# Altium PCB servo_pwr.PcbDoc (part 2 of 2)
Units mm, origin at the board's own origin, x right, y up, seen from the top; angles counter-clockwise.
Board outline 96 x 219 mm, 2 copper layers (Top Layer, Bottom Layer), stack 1.57 mm thick; 132 components, 82 nets, 367 pads, 95 vias.
Unrouted connection lines stored in the file: 2.
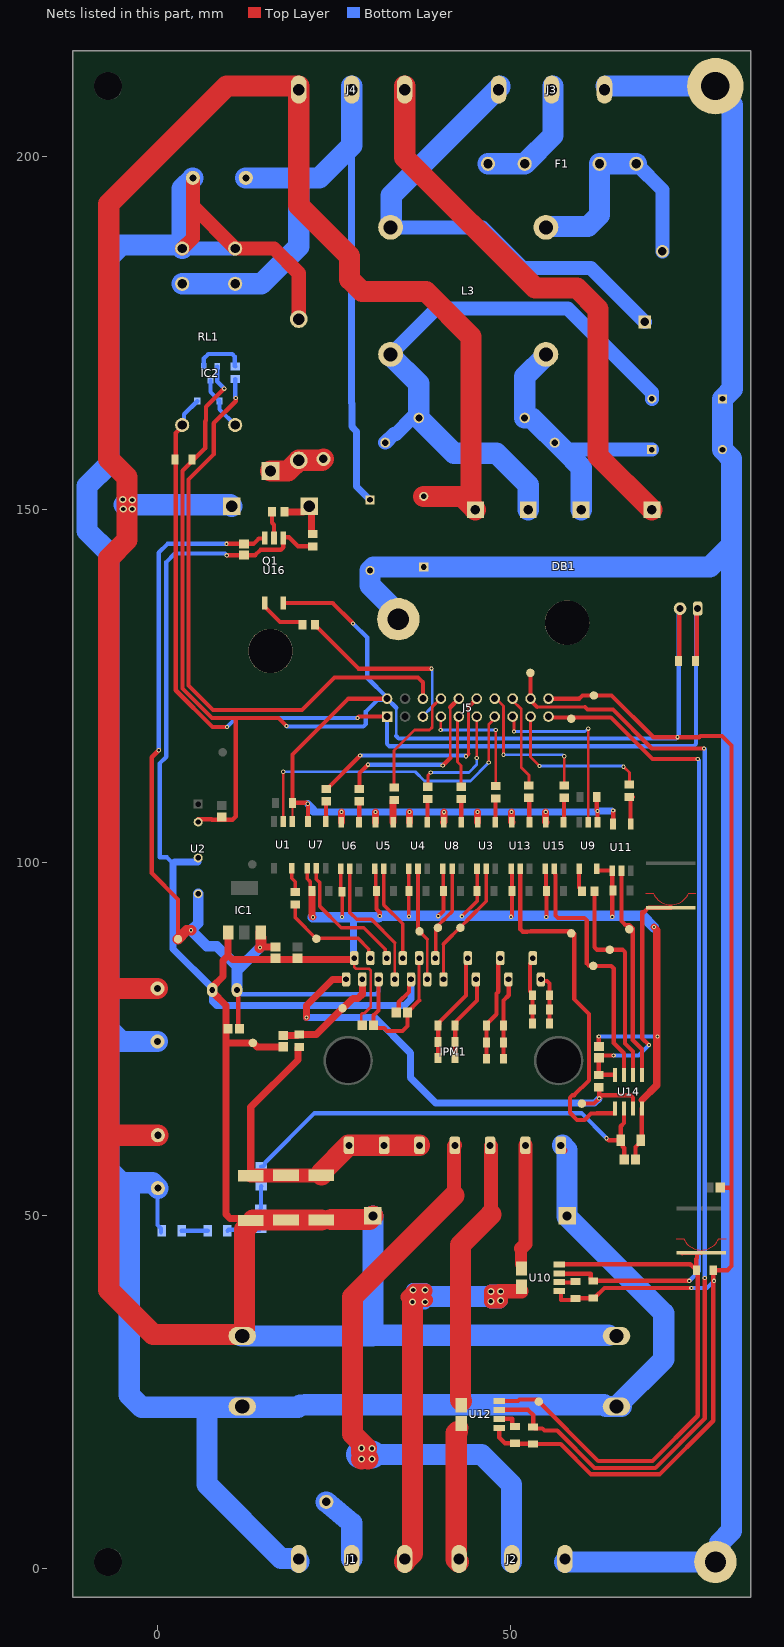
[diagram p2: the nets of this part, all layers, seen from the top]

## Via types
v1: diameter 0.6, hole 0.3, Top Layer to Bottom Layer, 78 vias
v2: diameter 1, hole 0.6, Top Layer to Bottom Layer, 17 vias

## Nets (pads, with @x,y where several pads share a name; then routed paths per layer and width w, separated by ;. In a path a pad name is that pad's centre, name@x,y a point inside that pad or via, vN(x,y) a via of type N, cw(c..) or ccw(c..) an arc to the next point about the centre after c; other vN are vias at no path point) (continued)
+15_HOT: C9.2 C10.1 C14.2 C15.2 C19.2 C37.2 IC1.3 IPM1.10 IPM1.15 TP8.1 U2.6 U16.6 | length 151.8
  Top Layer w0.4: 37.05,80.5 IPM1.10@37.05,86.5
  Top Layer w0.6: v1(0.175,115.95) -0.825,114.95 -0.825,98.544 2.9,94.819 TP8.1@2.9,89.2 ; v1(9.775,145.175) C37.2@12.225,145.175 13.575,145.175 14.35,145.95 15.15,145.95 U16.6@15.2,146 ; C10.1@11.25,82 11.422,81.828 11.422,76.678 C9.2@11.6,76.5 ; IPM1.15@31.3,83.5 31.3,79.1 30.6,78.4 C19.2@30.6,77 30.6,76.95 30.95,76.6 32.1,76.6 32.5,76.2 34.7,76.2 35.4,76.9 C15.2@35.4,78.8 35.4,78.85 37.05,80.5
  Top Layer w1: v1@14.6,88.1 C14.2@16.7,88.1
  Top Layer w1.5: TP8.1@2.9,89.2 4.15,90.45 v1(4.75,90.45) ; v1(14.5,88) 14.6,88.1 14.659,88.159 14.659,89.402 14.6,89.461 IC1.3@14.6,90.15
  Bottom Layer w0.6: v1(0.175,115.95) 0.175,143.925 1.425,145.175 v1(9.775,145.175) ; C10.1@11.25,82 11.25,81.994 11.666,81.578 11.672,81.578 11.85,81.4 30.949,81.4 31.3,81.751 IPM1.15@31.3,83.5
  Bottom Layer w1.5: U2.6@5.75,95.615 5.75,91.45 v1(4.75,90.45) 7,88.2 8.4,88.2 11.25,85.35 11.25,84.75 ; C10.1@11.25,82 11.25,84.75 ; v1(14.5,88) 11.25,84.75
+24: C46.1 C47.2 D2.2 J5.1 J6.1 RL1.2 | length 149.6
  Top Layer w0.6: RL1.2@3.5,162 3.5,161.799 2.575,160.874 2.575,124.45 7.775,119.25 v1(9.825,119.25) ; v1(28.325,120.525) 28.51,120.71 J5.1@32.51,120.71 ; C47.2@76.2,128.6 76.35,128.75 76.35,135.85 J6.1@76.5,136
  Bottom Layer w0.6: RL1.2@3.5,162 3.768,162.268 3.768,163.518 5.625,165.375 D2.2@5.625,165.4 ; v1(9.825,119.25) 11.1,120.525 v1(28.325,120.525) ; J5.1@32.51,120.71 32.51,116.851 32.861,116.5 75.899,116.5 76.25,116.851 76.25,135.75 J6.1@76.5,136
+Ug: C39.1 C40.1 C43.2 D1.K IPM1.26 J1.1 R15.2 R23.2 R24.2 R28.2 RL1.4 | length 395
  Top Layer w1: IPM1.26@57.1,60 57.1,59.5 57.35,59.25 IPM1.26@57.575,59.25 ; C43.2@58,50 C43.2@58.65,50.65
  Top Layer w2: RL1.4@3.5,187 5,188.5 5,193 ; R28.2@5,197 5,193 ; D1.K@20,177 20,183.5 16.5,187 RL1.4@11,187 5,193
  Bottom Layer w0.6: R23.2@0.05,53.925 0,53.875 0,48.725 0.5,48.225 R15.2@0.5,47.7
  Bottom Layer w2: RL1.4@3.5,187 RL1.4@11,187
  Bottom Layer w3: R24.2@0,74.7 -5.143,74.7 -6.9,76.457 ; R23.2@0.05,53.925 -0.725,54.7 -4,54.7 -5.143,54.7 ; 3.471,188.529 3.471,195.471 R28.2@5,197 ; RL1.4@3.5,187 3,187.5 -5.143,187.5 -6.9,185.743 -6.9,156.425 -9.975,153.35 -9.975,147 -6.9,143.925 -6.9,76.457 ; J1.1@20,1 20,1.1 19.6,1.5 17.5,1.5 7,12 7,22.7 7.2,22.9 ; IPM1.26@57.35,60 58,59.35 C43.2@58,50 58,49.905 71.7,36.205 71.7,29.7 C40.1@65,23 C40.1@65.7,23 ; C40.1@64.55,23 63.5,23 63.238,23.262 20.912,23.262 20.85,23.2 20.2,23.2 19.9,22.9 12,22.9 7.2,22.9 ; -6.9,76.457 -6.9,56.457 -5.143,54.7 ; -5.143,54.7 -4,53.557 -4,24.657 -2.243,22.9 7.2,22.9
AC-L: F1.1 J3.2 | length 17.9
  Bottom Layer w3: F1.1@46.8,199 F1.1@52,199 56,203 J3.2@56,210
AC-N: J3.3 L3.1 RV1.1 | length 68
  Bottom Layer w2: L3.1@33,190 46,190 51.75,184.25 61.35,184.25 RV1.1@69,176.6
  Bottom Layer w3: L3.1@33,190 33.096,190.096 33.096,194.496 48.5,209.9 J3.3@48.5,210
ADC_CLK: J5.14 R21.1 | length 21.4
  Top Layer w0.4: J5.14@47.75,123.25 47.959,123.25 49,122.209 v1(49,115.3) ; R21.1@57.6,110.975 v1(57.6,115.1)
  Bottom Layer w0.4: v1(49,115.3) 57.346,115.3 57.546,115.1 v1(57.6,115.1)
ADC_CS: J5.13 R20.1 | length 13.2
  Top Layer w0.4: J5.13@50.29,123.25 50.29,123.01 51.5,121.8 51.5,113.5 52.6,112.4 R20.1@52.6,110.975
ADC_MISO: J5.8 U9.5 | length 26.1
  Top Layer w0.4: J5.8@50.29,120.71 50.462,120.538 50.462,118.638 v1(50.5,118.6) ; U9.5@61,105.75 v1(61,119)
  Bottom Layer w0.4: v1(50.5,118.6) 60.546,118.6 60.946,119 v1(61,119)
ADC_MOSI: J5.9 R13.1 | length 22.3
  Top Layer w0.4: J5.9@52.83,120.71 52.83,114.97 v1(54.1,113.7) ; v1(66,113.6) 66.825,112.775 R13.1@66.825,111.1
  Bottom Layer w0.4: v1(54.1,113.7) 65.846,113.7 65.946,113.6 v1(66,113.6)
B-: D1.A pad.1@23.5,157.2 Q1.2 | length 8.2
  Top Layer w3: Q1.2@16,155.5 18.5,155.5 D1.A@20,157 23.3,157 pad.1@23.5,157.2
BRAKE: J5.3 R22.1 | length 26.5
  Top Layer w0.6: R22.1@22.275,133.7 22.275,133.6 22.55,133.325 22.65,133.325 28.475,127.5 v1(38.8,127.5)
  Bottom Layer w0.4: J5.3@37.59,120.71 37.59,120.79 38.9,122.1 38.9,127.346 38.8,127.446 v1(38.8,127.5)
EARTH: C41.2 C42.1 C44.2 C45.1 DB1. J2.3 J3.1 MH3.1 MH4.1 MH7.1 Q1. | length 310.2
  Bottom Layer w3: MH4.1@34.1,134.5 34.1,135.312 30.1,139.312 C44.2@30.1,141.4 30.6,141.9 78.2,141.9 81.3,145 ; J2.3@57.627,1 MH3.1@79,1 79.574,1.574 79.574,3.695 81.3,5.421 81.3,145 ; J3.1@63.5,210 MH7.1@79,210 79,209.729 81.4,207.329 81.4,167.098 C42.1@80,165.698 C41.2@80,158.52 81.3,157.22 81.3,145
GND: C1.1 C2.1 C23.1 C26.1 C27.1 C28.1 C29.1 C32.1 C33.1 C46.2 C47.1 IC2.2 J5.11 J5.20 J6.2 TP13.1 U1.4 U2.2 U3.3 U4.3 U5.3 U6.3 U7.3 U8.3 U9.4 U10.5 U11.3 U12.5 U13.3 U15.3 U16.3 | length 478
  Top Layer w0.3: U1.4@19.1,105.85 C1.1@19.1,108.5
  Top Layer w0.6: U2.2@5.75,106.185 7.645,106.185 7.73,106.1 10.625,106.1 11.075,106.55 11.075,120.5 ; v1(9.45,167.15) 6.88,164.58 6.88,162.659 6.75,162.528 6.75,158.725 3.55,155.525 3.55,124.675 7.725,120.5 11.075,120.5 ; U16.3@17.8,136.8 24.8,136.8 27.5,134.1 v1(27.7,133.9) ; v1(18.25,119.375) 17.125,120.5 11.075,120.5 ; U7.3@21.3,105.85 21.3,108.35 v1(21.275,108.375) 21.15,108.5 C1.1@19.1,108.5 19.1,115.325 27.025,123.25 J5.20@32.51,123.25 ; U12.5@48.4,19.995 48.4,18.6 49.2,17.8 C33.1@50.6,17.8 50.65,17.75 53.15,17.75 C32.1@53.2,17.7 57.1,17.7 61.4,13.4 71.1,13.4 78.7,21 C27.1@78.7,42.3 80.7,42.3 81.3,42.9 81.3,53.649 ; J5.11@55.37,123.25 59.732,123.25 60.182,123.7 TP13.1@61.8,123.7 64.3,123.7 70.199,117.801 v1(73.624,117.801) 76.711,117.801 76.862,117.951 79.949,117.951 81.3,116.6 81.3,53.649 ; U10.5@56.9,39.338 57.026,39.338 57.151,39.213 57.151,38.1 C29.1@59.2,38.1 ; C29.1@59.2,38.3 59.25,38.35 61.65,38.35 C28.1@61.7,38.4 61.9,38.4 63.3,39.8 v1(75.6,39.8) ; C23.1@62.2,109.3 62.2,107.45 v1(62.325,107.325) 62.3,107.3 U9.4@62.3,105.75 ; U11.3@64.5,105.5 64.525,105.525 v1(64.525,107.425) ; C47.1@73.8,128.6 73.9,128.7 73.9,135.9 J6.2@74,136 ; C26.1@79.7,54 80.949,54 81.3,53.649
  Top Layer w1: U6.3@26.035,105.75 26.05,105.765 v1(26.05,107.225) ; U5.3@30.863,105.75 30.875,105.762 v1(30.875,107.2) ; v1(35.675,107.2) 35.675,105.765 U4.3@35.69,105.75 ; U8.3@40.517,105.75 40.575,105.808 v1(40.575,107.175) ; v1(45.325,107.2) 45.325,105.769 U3.3@45.344,105.75 ; v1(50.125,107.225) 50.125,105.797 U13.3@50.172,105.75 ; v1(54.975,107.225) 54.975,105.775 U15.3@55,105.75
  Bottom Layer w0.4: 33.8,117.976 33.8,121.96
  Bottom Layer w0.6: IC2.2@8.45,170.3 8.45,168.15 v1(9.45,167.15) ; v1(18.25,119.375) 18.3,119.325 29.149,119.325 29.5,119.676 29.5,121.45 31.128,123.078 32.338,123.078 J5.20@32.51,123.25 ; v1(27.7,133.9) 29.7,131.9 29.7,126.203 32.51,123.393 J5.20@32.51,123.25 ; 33.8,117.976 34.151,117.625 73.449,117.625 73.8,117.976 73.8,135.8 J6.2@74,136 ; 33.8,121.96 J5.20@32.51,123.25 ; v1@64.35,107.35 64.425,107.425 v1(64.525,107.425) ; v1(75.6,39.8) 77.8,39.8 v1(78.8,40.8)
  Bottom Layer w1: v1(21.275,108.375) 22.05,107.6 22.05,107.175 v1(40.575,107.175) 62.175,107.175 v1(62.325,107.325) ; v1@62.325,107.35 v1@64.35,107.35
GNDH: C3.1 C4.1 C5.1 C6.1 C7.1 C8.1 C9.1 C10.2 C14.1 C15.1 C19.1 C24.1 C25.1 C30.1 C31.1 C34.1 C35.1 C36.1 C37.1 C39.2 C40.2 C43.1 C45.2 DB1.4 IC1.1 IPM1.11 IPM1.18 J4.3 Q1.3 R11.1 R12.1 R14.1 R19.1 R23.1 R24.1 R26.1 TP10.1 U2.4 U3.4 U4.4 U5.4 U6.4 U7.4 U8.4 U9.3 U11.4 U13.4 U14.4 U15.4 U16.4 | length 803.9
  Top Layer w0.4: IPM1.18@27.85,86.5 27.85,86.4 27.85,85.234 28.084,85 29.966,85 30.2,84.766 30.2,79.6 29.3,78.7 29.034,78.7 28.846,78.512 28.846,77.154 C19.1@29,77
  Top Layer w0.5: U7.4@21.2,99.25 21.2,97.75 21.6,97.35 21.6,96.25 C8.1@21.85,96 ; U6.4@25.935,99.15 25.935,96.515 26.25,96.2 C7.1@26.25,96 ; C7.1@26.1,95.9 26.142,95.858 v1(26.142,92.317) ; U5.4@30.763,99.15 30.881,99.031 30.881,96.119 C6.1@31,96 ; U4.4@35.59,99.15 35.595,99.145 35.595,96.005 C5.1@35.6,96 v1(35.6,92.4) ; U8.4@40.417,99.15 40.459,99.109 40.459,96.041 C4.1@40.5,96 ; v1(43.1,92.425) 45.25,94.575 C3.1@45.25,96 45.247,96.003 45.247,99.147 U3.4@45.244,99.15
  Top Layer w0.6: v1(9.8,143.55) 12.2,143.55 C37.1@12.225,143.575 13.825,143.575 14.575,144.325 17.449,144.325 17.8,144.676 U16.4@17.8,146 17.9,146.1 18.625,146.1 19.9,144.825 R26.1@22,144.825 ; C6.1@31,96 31,93.425 31.475,92.95 v1(31.475,92.475) ; C15.1@33.8,78.8 34.15,79.15 34.15,80.25 35.6,81.7 35.6,83.2 IPM1.11@35.9,83.5 ; v1(39.75,92.45) 40.5,93.2 C4.1@40.5,96 ; U13.4@50.072,99.15 50.072,98.8 50.2,98.672 C34.1@50.2,96 50.2,92.475 v1(50.075,92.35) ; U15.4@54.9,99.15 55,99.05 55,96.1 C36.1@55.1,96 55.1,92.375 v1(55.05,92.325) ; U9.3@62.2,99.15 62.2,99 62.3,98.9 U11.4@64.4,98.9 v1(64.4,92.35) ; C35.1@62.5,74 v1(62.5,75.4) ; C31.1@67.7,58 67.7,59.775 68.4,60.475 R19.1@68.4,60.7 68.584,60.884 68.584,65.217 U14.4@68.605,65.238 68.605,66.405
  Top Layer w1: IC1.1@10,90.15 10,86.9 ; R14.1@13.2,49.35 12.9,49.65 10.286,49.65 9.7,50.236 9.7,74.6 ; C24.1@17.8,73.95 14.104,73.95 13.554,74.5 TP10.1@13.5,74.5 9.8,74.5 9.7,74.6 ; C8.1@21.85,96 21.85,92.45 v1(22,92.3) ; IPM1.18@27.85,86.4 27.75,86.3 19.8,86.3 16.7,86.3 10.6,86.3 10,86.9 ; 68.605,66.405 70.7,68.5 70.7,90.5 v1(70.3,90.9) ; 9.7,74.6 9.7,76.5 9.7,79.8 7.75,81.75 C10.2@7.75,82 7.75,82.385 9.26,83.895 9.26,86.16 10,86.9
  Top Layer w3: R24.1@0,82.2 -6.5,82.2 -6.9,82.6 ; R23.1@0.05,61.425 -6.625,61.425 -6.9,61.7 ; R14.1@12.875,48.65 12.3,48.075 12.3,33.2 -0.6,33.2 -6.9,39.5 -6.9,61.7 ; R14.1@13.525,49.425 R12.1@17.875,49.425 ; R12.1@18.2,49.425 R11.1@23.2,49.425 ; R11.1@24.6,49.5 30,49.5 C43.1@30.5,50 ; C45.2@37.7,151.9 43.1,151.9 DB1.4@44.4,150.6 ; DB1.4@45,150 DB1.4@44.4,150.6 ; -6.9,61.7 -6.9,82.6 ; -6.9,82.6 -6.9,143.1 -4.3,145.7 -4.3,151.4 -4.3,154.6 -6.9,157.2 -6.9,193.3 9.8,210 20,210 20,193.1 27.2,185.9 27.2,182.657 28.957,180.9 38,180.9 44.4,174.5 44.4,151.9 DB1.4@44.4,150.6
  Bottom Layer w0.6: 2.2,99.914 1.339,100.775 0.3,100.775 0.3,114.075 1.25,115.025 1.25,142.6 2.45,143.8 9.55,143.8 v1(9.8,143.55) ; v1(62.5,75.4) v1(70.8,75.4)
  Bottom Layer w1: U2.4@5.75,100.14 2.426,100.14 2.2,99.914 2.2,87.8 7.75,82.25 C10.2@7.75,82 7.8,81.95 7.8,80.386 8.386,79.8 35,79.8 35.9,80.7 IPM1.11@35.9,83.5 ; 27.75,92.399 27.75,86.6 IPM1.18@27.85,86.5
  Bottom Layer w1.5: v1(22,92.3) 26.125,92.3 v1(26.142,92.317) 27.484,92.317 ; 27.75,92.3 31.3,92.3 v1(31.475,92.475) ; v1@31.475,92.486 35.6,92.486 39.75,92.486 43.1,92.486 50.075,92.486 55.05,92.486 64.4,92.486 68.714,92.486 v1(70.3,90.9)
  Bottom Layer w2: C43.1@29.925,49.425 C43.1@30.5,50
  Bottom Layer w3: -4.7,150.7 -3.4,150.7 10.3,150.7 Q1.3@10.5,150.5 ; C39.2@11.9,33 C39.2@12,33 30.4,33 30.5,33.1 ; C43.1@30.5,50 30.5,33.1 ; C40.2@63.85,33.1 30.5,33.1
  other v2: -4.85,150.1 -3.575,150.125 -3.575,151.4 -4.925,151.45
HinU: J5.4 R6.1 | length 17.6
  Top Layer w0.4: v1(40.1,118.8) J5.4@40.1,120.68 ; R6.1@47.9,110.875 v1(47.9,118.8)
  Top Layer w0.6: J5.4@40.1,120.68 J5.4@40.13,120.71
  Bottom Layer w0.4: v1(40.1,118.8) v1(47.9,118.8)
HinV: J5.5 R3.1 | length 10.2
  Top Layer w0.4: J5.5@42.67,120.71 42.5,120.54 42.5,114.3 43,113.8 R3.1@43,110.775
HinW: J5.6 R4.1 | length 16
  Top Layer w0.4: R4.1@38.3,110.775 38.3,112.4 v1(38.7,112.8) ; v1(45.21,114.844) J5.6@45.21,120.71
  Bottom Layer w0.4: v1(38.7,112.8) 44.1,112.8 45.21,113.91 v1(45.21,114.844)
I_U: C28.2 J5.10 TP14.1 U10.7 | length 117.5
  Top Layer w0.6: J5.10@55.37,120.71 55.48,120.6 64.2,120.6 70.1,114.7 v1(76.5,114.7) ; U10.7@56.9,41.878 56.978,41.8 61.349,41.8 61.349,41 61.549,40.8 C28.2@61.7,40.8 v1(75.3,40.8)
  Bottom Layer w0.6: v1(75.3,40.8) 76.7,42.2 76.7,114.5 v1(76.5,114.7)
I_V: C32.2 J5.12 TP16.1 U12.7 | length 162.6
  Top Layer w0.4: 53.763,122.073 60.527,122.073
  Top Layer w0.6: U12.7@48.4,22.535 52.465,22.535 53.2,21.8 C32.2@53.2,20.1 53.4,19.9 54.5,19.9 54.8,19.6 56.6,19.6 61.9,14.3 70.5,14.3 77.5,21.3 v1(77.5,41.2) ; TP16.1@52.8,126.9 52.815,126.885 52.815,123.021 53.763,122.073 ; 60.527,122.073 60.9,121.7 64.5,121.7 70,116.2 v1(77.4,116.2)
  Bottom Layer w0.6: v1(77.4,116.2) 77.5,116.1 v1(77.5,41.2)
IGBT_flt: J5.7 U1.5 | length 44.6
  Top Layer w0.4: U1.5@17.8,105.85 v1(17.8,112.9) ; v1(46.9,114.2) 46.9,119.574 47.75,120.424 J5.7@47.75,120.71
  Bottom Layer w0.4: v1(17.8,112.9) 36.5,112.9 37.8,111.6 44.3,111.6 v1(46.9,114.2)
IGBT_Temp: IPM1.19 R8.1 TP17.1 U14.3 | length 68.6
  Top Layer w0.6: TP17.1@60.1,65.9 61.8,65.9 v1(62.55,66.65) ; R8.1@62.5,68.225 62.55,68.175 v1(62.55,66.65) ; U14.3@67.335,65.238 67.335,66.749 66.984,67.1 63,67.1 v1(62.55,66.65)
  Top Layer w1: v1(21.1,78.1) 21.1,79.8 24.8,83.5 IPM1.19@26.7,83.5
  Bottom Layer w1: v1(21.1,78.1) 30.8,78.1 35.8,73.1 35.8,69.6 39.4,66 61.9,66 v1(62.55,66.65)
LinU: J5.17 R5.1 | length 16.6
  Top Layer w0.4: R5.1@33.5,110.675 33.5,115.9 36.4,118.8 38.5,118.8 38.9,119.2 38.9,122.1 40.05,123.25 J5.17@40.13,123.25
LinV: J5.16 R1.1 | length 25
  Top Layer w0.4: 41.449,114.849 41.449,122.029
  Top Layer w0.6: R1.1@28.6,110.475 28.6,112.7 v1(29.8,113.9) ; v1(40.4,113.8) 41.449,114.849 ; 41.449,122.029 J5.16@42.67,123.25
  Bottom Layer w0.6: v1(29.8,113.9) 40.3,113.9 v1(40.4,113.8)
LinW: J5.15 R2.1 | length 30.6
  Top Layer w0.4: 44.033,115.433 44.033,122.073
  Top Layer w0.6: R2.1@23.9,110.475 24,110.475 v1@28.713,115.187 ; v1(43.7,115.1) 44.033,115.433 ; 44.033,122.073 J5.15@45.21,123.25
  Bottom Layer w0.6: v1(28.7,115.2) 43.6,115.2 v1(43.7,115.1)
NetC11_1: C11.1 C16.1 C22.1 IPM1.2 | length 9.6
  Top Layer w0.6: C11.1@53.1,77.25 C16.1@53.1,79.25 53.1,81.45 52.75,81.8 52.75,85.7 53.15,86.1 IPM1.2@53.15,86.5
NetC11_2: C11.2 C16.2 C22.2 IPM1.1 | length 7.1
  Top Layer w0.6: IPM1.1@54.3,83.5 54.55,83.25 55.149,83.25 55.5,82.899 C22.2@55.5,81.25 C16.2@55.5,79.25 C11.2@55.5,77.25
NetC12_1: C12.1 C17.1 C20.1 IPM1.4 | length 15.1
  Top Layer w0.6: C12.1@46.6,72.25 C20.1@46.6,74.55 C17.1@46.6,76.95 46.6,77.15 48,78.55 48,81.5 48.25,81.75 48.25,86.2 IPM1.4@48.55,86.5
NetC12_2: C12.2 C17.2 C20.2 IPM1.3 | length 11.6
  Top Layer w0.6: C12.2@49,72.25 C20.2@49,74.55 C17.2@49,76.95 49,80.5 49.75,81.25 49.75,83.45 IPM1.3@49.7,83.5
NetC13_1: C13.1 C18.1 C21.1 IPM1.6 | length 15.9
  Top Layer w0.6: C13.1@39.75,72.35 C18.1@39.75,74.65 C21.1@39.75,76.95 39.95,77.15 39.95,77.45 43.7,81.2 43.7,86.25 IPM1.6@43.95,86.5
NetC13_2: C13.2 C18.2 C21.2 IPM1.5 | length 12.5
  Top Layer w0.6: C13.2@42.15,72.35 C18.2@42.15,74.65 C21.2@42.15,76.95 42.35,77.15 42.35,77.6 45.25,80.5 45.25,83.35 IPM1.5@45.1,83.5
NetC24_2: C24.2 IPM1.17 R9.1 TP9.1 | length 15.7
  Top Layer w1: C24.2@17.8,75.55 19.825,75.55 19.95,75.675 R9.1@20.05,75.675 22.475,75.675 TP9.1@26.2,79.4 26.254,79.4 27.654,80.8 28.414,80.8 29,81.386 IPM1.17@29,83.5
NetC27_2: C27.2 pad.2@77,44.75 TP15.1 U10.8 U12.8 | length 88.4
  Top Layer w0.15: 73.45,46.8 74.5,46.8 ccw(c77,47.9) 77,45.169 ccw(c77,47.9) 79.5,46.8 80.55,46.8
  Top Layer w0.6: U12.8@48.4,23.805 51.064,23.805 51.259,24 53.7,24 62.4,15.3 70.1,15.3 76.5,21.7 76.5,42.1 C27.2@76.3,42.3 C27.2@76.3,42.5 ; U10.8@56.9,43.148 75.452,43.148 75.9,42.7 76.1,42.7 C27.2@76.3,42.5 ; pad.2@74.3,44.7 74.35,44.75 pad.2@76.449,44.75 ; pad.2@77,44.75 pad.2@76.449,44.75 ; C27.2@76.3,42.5 76.3,43.9 76.399,43.999 76.399,44.7 pad.2@76.449,44.75
NetC29_2: C29.2 U10.6 | length 2.3
  Top Layer w0.6: U10.6@56.9,40.608 56.954,40.554 59.146,40.554 C29.2@59.2,40.5
NetC31_2: C31.2 R18.1 R19.2 U14.2 | length 63.4
  Top Layer w0.6: v1(63.6,61) 63.9,60.7 R19.2@65.6,60.7 ; U14.2@66.065,65.238 66.065,63.165 65.6,62.7 R19.2@65.6,60.7 ; C31.2@66.1,58 66.1,59.6 65.9,59.8 65.9,60.4 R19.2@65.6,60.7
  Bottom Layer w0.6: R18.1@14.7,57 14.925,57 15.225,57.3 15.225,57.525 22.249,64.549 60.051,64.549 v1(63.6,61)
NetC33_2: C33.2 U12.6 | length 3.1
  Top Layer w0.6: U12.6@48.4,21.265 50.249,21.265 50.249,20.4 50.449,20.2 C33.2@50.6,20.2
NetC35_2: C35.2 pad.1@72.7,93.65 R8.2 U14.8 | length 44.5
  Top Layer w0.15: 69.15,95.7 70.2,95.7 ccw(c72.7,96.8) 72.7,94.069 ccw(c72.7,96.8) 75.2,95.7 76.25,95.7
  Top Layer w0.6: v1(64.6,72.7) 62.8,72.7 C35.2@62.5,72.4 R8.2@62.5,69.975 64.774,69.975 64.774,70 64.795,69.979 U14.8@64.795,69.962 ; v1(69.6,74.2) 68.651,75.149 68.651,93 68.9,93 69.55,93.65 pad.1@72.7,93.65
  Bottom Layer w0.6: v1(64.6,72.7) 68.1,72.7 v1(69.6,74.2)
NetC38_1: C38.1 C41.1 DB1.2 L3.4 R27.2 | length 40.1
  Bottom Layer w2: C38.1@52,163 C38.1@52.3,162.7 ; 57.48,158.52 C41.1@70,158.52
  Bottom Layer w3: L3.4@55,172 55,171.865 52,168.865 C38.1@52,163 53,163 57.48,158.52 60,156 DB1.2@60,150
NetC38_2: C38.2 C42.2 DB1.3 L3.2 R27.1 | length 85.3
  Bottom Layer w2: R27.1@32.25,159.5 33.5,160.75 33.75,160.75 36,163 C38.2@37,163 ; L3.2@33,172 39.5,178.5 58.1,178.5 70,166.6 C42.2@70,165.698
  Bottom Layer w3: L3.2@33,172 33,171.865 37,167.865 C38.2@37,163 42,158 48,158 52.5,153.5 DB1.3@52.5,150
NetD2_1: D2.1 IC2.3 RL1.1 | length 7.7
  Bottom Layer w0.6: IC2.3@7.5,168.3 7.5,166.7 8.775,165.425 D2.1@8.775,165.4 8.775,164.225 RL1.1@11,162
NetF1_2: F1.2 L3.3 RV1.2 | length 34.7
  Bottom Layer w2: F1.2@67.8,199 71.5,195.3 RV1.2@71.5,186.6
  Bottom Layer w3: L3.3@55,190 55.096,190.096 60.938,190.096 62.6,191.757 F1.2@62.6,199 F1.2@67.8,199
NetIC2_1: IC2.1 R29.2 | length 7.4
  Bottom Layer w0.6: IC2.1@6.55,170.3 6.55,171.425 7.2,172.075 10.574,172.075 10.925,171.724 10.925,170.35 R29.2@11,170.275
NetIPM1_7: IPM1.7 TP3.1 U3.5 | length 18.2
  Top Layer w0.4: IPM1.7@40.5,83.5 40.5,88.5
  Top Layer w0.5: 40.5,88.5 43.15,91.15 43.161,91.15 43.6,91.589 43.6,91.6 43.611,91.6 44.05,92.039 44.05,92.05 46.544,94.544 U3.5@46.544,99.15
NetIPM1_8: IPM1.8 TP4.1 U8.5 | length 13.6
  Top Layer w0.5: IPM1.8@39.35,86.5 39.4,86.55 39.4,90.8 40.05,91.45 40.05,91.461 40.489,91.9 40.5,91.9 40.5,91.911 40.939,92.35 40.95,92.35 41.717,93.117 U8.5@41.717,99.15
NetIPM1_9: IPM1.9 TP5.1 U4.5 | length 16.2
  Top Layer w0.4: IPM1.9@38.2,83.5 38.2,89.2
  Top Layer w0.5: U4.5@36.89,99.15 36.89,90.51 38.2,89.2
NetIPM1_12: IPM1.12 U5.5 | length 13.8
  Top Layer w0.5: U5.5@32.063,99.15 32.063,94.037 34.75,91.35 IPM1.12@34.75,86.5
NetIPM1_13: IPM1.13 U6.5 | length 19.5
  Top Layer w0.4: IPM1.13@33.6,83.5 33.6,88.7
  Top Layer w0.5: U6.5@27.235,99.15 27.235,92.965 28.2,92 30.3,92 33.6,88.7
NetIPM1_14: IPM1.14 U7.5 | length 18.7
  Top Layer w0.5: U7.5@22.5,99.25 22.5,97.7 23,97.2 23,93.825 26.025,90.8 29.2,90.8 32.233,87.767 32.233,86.717 IPM1.14@32.45,86.5
NetIPM1_16: IPM1.16 R7.2 TP2.1 | length 15.6
  Top Layer w0.5: R7.2@19.5,94.125 19.5,92.25 TP2.1@22.5,89.25 22.55,89.3 28.4,89.3 29.933,87.767 29.933,86.717 IPM1.16@30.15,86.5
NetIPM1_20: IPM1.20 IPM1.21 IPM1.22 R9.2 R11.2 R12.2 R14.2 | length 46.9
  Top Layer w1: R14.2@13.2,55.7 13.2,65.4 19.9,72.1 19.9,73.85 19.975,73.925 R9.2@20.05,73.925
  Top Layer w2: R14.2@13.237,55.737 18.2,55.737 R11.2@23.162,55.737
  Top Layer w3: R11.2@23.2,55.775 23.2,56.15 27.05,60 IPM1.20@27.1,60 IPM1.21@32.1,60 IPM1.22@37.1,60
NetIPM1_24: IPM1.24 U12.1 U12.2 | length 37.9
  Top Layer w2: 47.2,50.2 IPM1.24@47.2,59.9
  Top Layer w3: U12.1@43.033,23.805 42.9,23.938 42.9,45.9 47.2,50.2
NetIPM1_25: IPM1.25 U10.1 U10.2 | length 17.1
  Top Layer w1.7: U10.1@51.5,43.181 51.5,45.4
  Top Layer w2: 51.5,45.4 52.1,46 IPM1.25@52.1,60
NetJ1_2: J1.2 pad.1@23.9,9.5 | length 9.8
  Bottom Layer w3: pad.1@23.9,9.5 27.5,6.5 J1.2@27.5,1.4
NetQ1_1: Q1.1 R25.2 R26.2 | length 8
  Top Layer w1: R25.2@17.975,149.7 20.7,149.7 Q1.1@21.5,150.5 21.825,150.175 21.825,146.65 21.9,146.575 R26.2@22,146.575
NetR1_2: R1.2 U6.1 | length 3
  Top Layer w0.6: U6.1@28.535,105.75 28.568,105.782 28.568,108.693 R1.2@28.6,108.725
NetR2_2: R2.2 U7.1 | length 2.9
  Top Layer w0.6: U7.1@23.8,105.85 23.85,105.9 23.85,108.675 R2.2@23.9,108.725
NetR3_2: R3.2 U8.1 | length 3.3
  Top Layer w0.6: R3.2@43,109.025 43.009,109.016 43.009,105.759 U8.1@43.017,105.75
NetR4_2: R4.2 U4.1 | length 3.3
  Top Layer w0.6: U4.1@38.19,105.75 38.245,105.805 38.245,108.97 R4.2@38.3,109.025
NetR5_2: R5.2 U5.1 | length 3.3
  Top Layer w1: U5.1@33.363,105.75 33.363,108.85 33.438,108.925 R5.2@33.5,108.925
NetR6_2: R6.2 U3.1 | length 3.4
  Top Layer w0.6: U3.1@47.844,105.75 47.872,105.778 47.872,109.097 R6.2@47.9,109.125
NetR7_1: R7.1 U1.3 | length 3.6
  Top Layer w0.5: U1.3@19,99.25 19,97.8 19.5,97.3 R7.1@19.5,95.875
NetR10_1: R10.1 U9.1 | length 3.3
  Top Layer w0.6: U9.1@59.7,99.15 59.7,96.525 60.125,96.1 R10.1@60.125,96
NetR10_2: R10.2 TP12.1 U14.6 | length 30.4
  Top Layer w0.6: R10.2@61.875,96 61.875,88.051 62.226,87.7 65.849,87.7 66.2,87.349 66.2,74.4 67.335,73.265 U14.6@67.335,69.962
NetR13_2: R13.2 U11.1 | length 4
  Top Layer w0.6: U11.1@67,105.5 67,109.05 67.275,109.325 R13.2@67.3,109.325
NetR15_1: R15.1 R16.2 | length 3.7
  Bottom Layer w0.6: R15.1@3.4,47.9 R16.2@7.1,47.9
NetR16_1: R16.1 R17.2 | length 4.8
  Bottom Layer w0.6: R16.1@9.9,47.9 10.05,48.05 14.45,48.05 R17.2@14.6,48.2
NetR17_1: R17.1 R18.2 | length 3.2
  Bottom Layer w0.6: R17.1@14.6,51 14.65,51.05 14.65,54.15 R18.2@14.7,54.2
NetR20_2: R20.2 U13.1 | length 3.5
  Top Layer w0.6: R20.2@52.6,109.225 52.636,109.189 52.636,105.786 U13.1@52.672,105.75
NetR21_2: R21.2 U15.1 | length 3.5
  Top Layer w0.6: U15.1@57.5,105.75 57.55,105.8 57.55,109.175 R21.2@57.6,109.225
NetR22_2: R22.2 U16.1 | length 7
  Top Layer w0.6: U16.1@15.2,136.8 15.2,136.25 17.35,134.1 20.125,134.1 20.15,134.075 20.25,134.075 20.525,133.8 R22.2@20.525,133.7
NetR25_1: R25.1 U16.5 | length 3.8
  Top Layer w0.6: R25.1@16.225,149.7 16.2,149.675 16.2,148.175 16.5,147.875 U16.5@16.5,146
NetTP18_1: TP18.1 U13.5 U14.1 | length 51.8
  Top Layer w0.6: U13.5@51.372,99.15 51.372,90.606 51.723,90.254 52.32,90.254 cw(c52.85,87.2) 52.85,90.3 53.45,90.3 58.649,90.3 59,89.949 59,80.7 61.1,78.6 61.1,69.2 59,67.1 58.751,67.1 58.4,66.749 58.4,64.6 59.4,63.6 60.5,63.6 61.4,64.5 62.2,64.5 62.253,64.553 64.774,64.553 64.795,64.574 U14.1@64.795,65.238
NetTP19_1: TP19.1 U11.5 U14.5 | length 30.5
  Top Layer w0.6: U11.5@65.7,98.9 65.7,91.751 66.251,91.2 66.8,91.2 67.3,90.7 67.3,74.9 68.605,73.595 U14.5@68.605,69.962
NetTP20_1: TP20.1 U14.7 U15.5 | length 37.3
  Top Layer w0.6: U15.5@56.2,99.15 56.3,99.05 56.3,98.424 56.375,98.349 56.375,92.551 56.726,92.2 60.449,92.2 60.8,91.849 60.8,85.751 61.151,85.4 TP20.1@61.7,85.4 64.249,85.4 64.6,85.049 64.6,74.5 66.065,73.035 U14.7@66.065,69.962
P0: DB1.1 J4.1 | length 78
  Top Layer w3: J4.1@35,210 35,199.9 53.5,181.4 59.4,181.4 62.4,178.4 62.4,157.6 DB1.1@70,150
P1: C44.1 J4.2 R28.1 RL1.3 | length 105
  Bottom Layer w1: 27.5,201.6 27.5,165.1 27.538,165.063 27.538,161.763 28.2,161.1 28.2,153.3 C44.1@30.1,151.4
  Bottom Layer w3: RL1.3@3.5,182 RL1.3@11,182 14.7,182 20,187.3 20,196.9 19.9,197 ; R28.1@12.5,197 19.9,197 ; J4.2@27.5,210 27.5,201.6 22.9,197 19.9,197
Softstart: J5.18 R29.1 | length 85.3
  Top Layer w0.6: v1(11.075,165.825) 11.075,165.375 7.95,162.25 7.95,157.85 4.4,154.3 4.4,125.125 7.875,121.65 20.45,121.65 25.05,126.25 36.9,126.25 37.59,125.56 J5.18@37.59,123.25
  Bottom Layer w0.6: R29.1@11,168.525 11,165.9 v1(11.075,165.825)
U_phase: J1.3 U10.3 U10.4 | length 67.4
  Top Layer w2: 35.4,38.5 36.3,39.4 v2@37.933,39.4 ; v2@36.1,38.1 v2@38,38.1 ; v2(47.2,39.3) v2(47.2,37.9) 48.5,37.9 v2(48.6,38) ; v2@47.533,39.3 v2@48.3,39.3 ; v2(48.6,39.3) v2@48.3,39.3 ; U10.4@51.533,39.338 48.338,39.338 v2@48.3,39.3
  Top Layer w3: J1.3@35,1 35,1.1 36.1,2.2 v2(36.1,37.8)
  Bottom Layer w2: v2(37.9,37.8) 37.828,37.728 36.172,37.728 v2(36.1,37.8) 36.2,37.9 v2(36.2,39.5) v2(37.9,39.5) ; 46.5,38.6 v2(47.2,39.3) v2(48.6,39.3) v2(48.6,38) 48.5,37.9 v2(47.2,37.9)
  Bottom Layer w3: 38.8,38.6 46.5,38.6
V_phase: J2.1 U12.3 U12.4 | length 19.4
  Top Layer w2: 42.5,19.462 U12.4@43.033,19.995
  Top Layer w3: 42.5,19.462 42.3,19.262 42.3,1.327 J2.1@42.627,1
W_phase: IPM1.23 J2.2 | length 85.8
  Top Layer w2: 42,52.9 42,59.9 IPM1.23@42.1,60
  Top Layer w3: v2(28.871,15.573) v2@28.9,15.602 ; v2(28.9,17.1) 28.9,16.5 29.8,15.6 ; 29.6,17.1 27.6,19.1 27.6,38.5 42,52.9
  Bottom Layer w3: 30.371,16.2 45.9,16.2 50.127,11.973 J2.2@50.127,1
  Bottom Layer w4: 28.7,16.2 30.371,16.2
  other v2: 30.371,15.573 30.371,17.073
pads on no net: IPM1. MH5.1 MH8.1

## Polygon pours and split planes (outlines as drawn)
+5_HOT on Top Layer "+5_HOT_L01_P000" (solid, pour order 0): 8.5,100.5 14.3,100.5 14.3,97.8 16.3,97.8 16.3,94.9 16.3,92.1 8.5,92.1

## Other copper
Top Layer:
  region net +3V3: 80.6,51.5 80.6,49 79.5,49 79.4,49.3 79.1,49.6 79,49.8 78.7,50 78.4,50.2 78,50.4 77.7,50.5 77.3,50.6 77,50.6 77,51.5
  region net +3V3: 73.4,51.5 73.4,49 74.5,49 74.6,49.3 74.9,49.6 75,49.8 75.3,50 75.6,50.2 76,50.4 76.3,50.5 76.7,50.6 77,50.6 77,51.5
  region net NetC27_2: 73.4,44.3 73.4,46.8 74.5,46.8 74.6,46.5 74.9,46.2 75,46 75.3,45.8 75.6,45.6 76,45.4 76.3,45.3 76.7,45.2 77,45.2 77,44.3
  region net NetC27_2: 80.6,44.3 80.6,46.8 79.5,46.8 79.4,46.5 79.1,46.2 79,46 78.7,45.8 78.4,45.6 78,45.4 77.7,45.3 77.3,45.2 77,45.2 77,44.3
  region net +5_HOT: 69.1,100.4 69.1,97.9 70.2,97.9 70.3,98.2 70.6,98.5 70.7,98.7 71,98.9 71.3,99.1 71.7,99.3 72,99.4 72.4,99.5 72.7,99.5 72.7,100.4
  region net +5_HOT: 76.3,100.4 76.3,97.9 75.2,97.9 75.1,98.2 74.8,98.5 74.7,98.7 74.4,98.9 74.1,99.1 73.7,99.3 73.4,99.4 73,99.5 72.7,99.5 72.7,100.4
  region net NetC35_2: 76.3,93.2 76.3,95.7 75.2,95.7 75.1,95.4 74.8,95.1 74.7,94.9 74.4,94.7 74.1,94.5 73.7,94.3 73.4,94.2 73,94.1 72.7,94.1 72.7,93.2
  region net NetC35_2: 69.1,93.2 69.1,95.7 70.2,95.7 70.3,95.4 70.6,95.1 70.7,94.9 71,94.7 71.3,94.5 71.7,94.3 72,94.2 72.4,94.1 72.7,94.1 72.7,93.2

## Silkscreen, mask and mechanical layers (free items; w line width, h text height)
Top Overlay:
  circle w0.254: c23.9,9.5 r1.414
  circle w0.254: c23.5,157.2 r1.4
  lines w0.2: 69.2,96.4 69.2,97.2 ; 73.5,47.5 73.5,48.3 ; 76.2,96.4 76.2,97.2 ; 80.5,47.5 80.5,48.3
  text "PE" at 62.254,202.854 h1.52
  text "-" at 19.154,202.792 h1.52
  text "P1" at 26.454,202.754 h1.52
  text "N" at 47.654,202.754 h1.52
  text "L" at 55.354,202.754 h1.52
  text "P0" at 33.854,202.654 h1.52
  text "Inverter PCB rev2 / W.Burdecki 2023 / github.com/wiciu15" at -9.8,197.5 h1.7 r270
  text "DANGER! / High Voltage! / DO NOT TOUCH" at 29.838,165.464 h2.5
  text "DANGER! / High Voltage! / Up to 5 minutes / after disconnection" at -9.5,13.867 h2.5
  text "+DC" at 17.254,9.254 h1.52
  text "B" at 27.254,9.254 h1.52
  text "U" at 34.254,9.254 h1.52
  text "V" at 42.254,9.254 h1.52
  text "W" at 49.254,9.254 h1.52
  text "PE" at 56.254,9.254 h1.52
Mechanical 1:
  lines w0.254: -11.9,-4 83.9,-4 83.9,214.5 83.9,214.9 -10.9,214.9 -11.9,214.9 -11.9,-4
Mechanical 13:
  lines w0.1: 69.2,93.3 69.2,100.3 76.2,100.3 76.2,93.3 69.2,93.3 ; 73.5,44.4 80.5,44.4 80.5,51.4 73.5,51.4 73.5,44.4
Mechanical 15:
  lines w0.05: 68.95,92.475 68.95,101.125 76.45,101.125 76.45,92.475 68.95,92.475 ; 73.25,43.575 80.75,43.575 80.75,52.225 73.25,52.225 73.25,43.575
  lines w0.1: 72.2,96.8 73.2,96.8 ; 72.7,96.3 72.7,97.3 ; 76.5,47.9 77.5,47.9 ; 77,47.4 77,48.4

## Text inside footprints (layer, text, board x,y; h text height)
C10: Top Overlay "+" at 11.25,80.75 h2 r180
C39: Bottom Overlay "+" at 9.25,23.3 h2 r90
C40: Bottom Overlay "+" at 62.25,23.3 h2 r90
DB1: Bottom Overlay "+" at 70.546,145.7 h1.52; Bottom Overlay "-" at 45.246,145.692 h1.52; Bottom Overlay "~" at 60.446,144.984 h1.52; Bottom Overlay "~" at 52.746,144.984 h1.52
F1: Top Overlay "F10A" at 54.654,198.354 h1.52
IPM1: Top Overlay "N" at 31.304,56.996 h1.52 r270; Top Overlay "W" at 41.304,57.496 h1.52 r270; Top Overlay "V" at 46.304,57.496 h1.52 r270; Top Overlay "U" at 51.554,57.496 h1.52 r270; Top Overlay "P" at 56.554,57.246 h1.52 r270; Top Overlay "26" at 59.554,59.504 h1.52; Top Overlay "20" at 22.054,59.254 h1.52; Top Overlay "19" at 22.354,83.754 h1.52; Top Overlay "1" at 55.704,83.754 h1.52
U2: Top Overlay "*" at 5.115,112.053 h1.27 r270; Mechanical 13 "*" at 5.115,110.783 h1.27 r270
U14: Top Overlay "*" at 64.364,64.666 h1.27 r90; Mechanical 13 "*" at 65.595,65.708 h1.27 r90